# EAGLE board CT_schematic (EAGLE 7.6.0)

Size 100 x 80 mm. Coordinates in mm from the lower left corner, seen from the top.
Outline: 0,0 100,0 100,80 0,80 0,0
Copper layers (1*16): Top 0.035mm / dielectric 1.5mm / Bottom 0.035mm
Design rules "default": minimum track width 10mil, minimum drill 24mil, track to track 8mil, track to pad 8mil, pad to pad 8mil, via to via 8mil, smd to smd 8mil, copper to edge 40mil, drill to drill 8mil, minimum pad ring 10mil, minimum via ring 8mil, stop-mask expansion 4mil, vias tented up to drill 0mil, thermal gap 10mil

## Footprints (pad centres in the part's own frame; a part is rotated, then mirrored left to right if it is on the bottom)
C0603 = smd 0.8 x 0.8: 1 -0.762,0; 2 0.762,0
C0402 = smd 0.5 x 0.5: 1 -0.508,0; 2 0.508,0
C0805 = smd 1.2 x 1.3: 1 -1.016,0; 2 1.016,0
C1210 = smd 1.2 x 2.5: 1 -1.524,0; 2 1.524,0
R0603 = smd 0.8 x 0.8: 1 -0.762,0; 2 0.762,0
EXV-9H = smd 3.505 x 1.676: 1 -2.857,0; 2 2.857,0
L0603 = smd 0.8 x 0.8: 1 -0.762,0; 2 0.762,0
L1210 = smd 1.2 x 2.5: 1 -1.524,0; 2 1.524,0
PJ-037B_PACKAGE = drill 3.7 square: 1 12,0 | drill 3.2 square: 2 6,0
UFBGA64 = smd 0.2 x 0.2: A1 -1.75,1.75; A2 -1.25,1.75; A3 -0.75,1.75; A4 -0.25,1.75; A5 0.25,1.75; A6 0.75,1.75; A7 1.25,1.75; A8 1.75,1.75; B1 -1.75,1.25; B2 -1.25,1.25; B3 -0.75,1.25; B4 -0.25,1.25; B5 0.25,1.25; B6 0.75,1.25; B7 1.25,1.25; B8 1.75,1.25; C1 -1.75,0.75; C2 -1.25,0.75; C3 -0.75,0.75; C4 -0.25,0.75; C5 0.25,0.75; C6 0.75,0.75; C7 1.25,0.75; C8 1.75,0.75; D1 -1.75,0.25; D2 -1.25,0.25; D3 -0.75,0.25; D4 -0.25,0.25; D5 0.25,0.25; D6 0.75,0.25; D7 1.25,0.25; D8 1.75,0.25; E1 -1.75,-0.25; E2 -1.25,-0.25; E3 -0.75,-0.25; E4 -0.25,-0.25; E5 0.25,-0.25; E6 0.75,-0.25; E7 1.25,-0.25; E8 1.75,-0.25; F1 -1.75,-0.75; F2 -1.25,-0.75; F3 -0.75,-0.75; F4 -0.25,-0.75; F5 0.25,-0.75; F6 0.75,-0.75; F7 1.25,-0.75; F8 1.75,-0.75; G1 -1.75,-1.25; G2 -1.25,-1.25; G3 -0.75,-1.25; G4 -0.25,-1.25; G5 0.25,-1.25; G6 0.75,-1.25; G7 1.25,-1.25; G8 1.75,-1.25; H1 -1.75,-1.75; H2 -1.25,-1.75; H3 -0.75,-1.75; H4 -0.25,-1.75; H5 0.25,-1.75; H6 0.75,-1.75; H7 1.25,-1.75; H8 1.75,-1.75
SSOP-20 = smd 1.651 x 0.432: 1 -3.48,2.925; 2 -3.48,2.275; 3 -3.48,1.625; 4 -3.48,0.975; 5 -3.48,0.325; 6 -3.48,-0.325; 7 -3.48,-0.975; 8 -3.48,-1.625; 9 -3.48,-2.275; 10 -3.48,-2.925; 11 3.48,-2.925; 12 3.48,-2.275; 13 3.48,-1.625; 14 3.48,-0.975; 15 3.48,-0.325; 16 3.48,0.325; 17 3.48,0.975; 18 3.48,1.625; 19 3.48,2.275; 20 3.48,2.925
HTSS-105-01-G-D = drill 1 pad 1.8 square: 1 0,0 | drill 1 pad 1.8: 2 0,2.54; 3 2.54,0; 4 2.54,2.54; 5 5.08,0; 6 5.08,2.54; 7 7.62,0; 8 7.62,2.54; 9 10.16,0; 10 10.16,2.54
SI7034-A10-IM = smd 0.75 x 0.4: 1 -1,0.5; 2 -1,-0.5; 4 1,-0.5; 5 1,0.5 | smd 0.8 x 1.7: 3 0,0
QFN-28 = smd 0.813 x 0.305: 1 -2.451,1.5; 2 -2.451,1; 3 -2.451,0.5; 4 -2.451,0; 5 -2.451,-0.5; 6 -2.451,-1; 7 -2.451,-1.5; 15 2.451,-1.5; 16 2.451,-1; 17 2.451,-0.5; 18 2.451,0; 19 2.451,0.5; 20 2.451,1; 21 2.451,1.5 | smd 0.305 x 0.813: 8 -1.5,-2.451; 9 -1,-2.451; 10 -0.5,-2.451; 11 0,-2.451; 12 0.5,-2.451; 13 1,-2.451; 14 1.5,-2.451; 22 1.5,2.451; 23 1,2.451; 24 0.5,2.451; 25 0,2.451; 26 -0.5,2.451; 27 -1,2.451; 28 -1.5,2.451 | smd 3.607 x 3.607: 29 0,0
SJ-43515TS-SMT-TR = smd 2.2 x 3: 1 0.6,-7.4; 4 3.4,-7.4 | smd 3 x 3: 2 12.8,-7.4; 5 17,-3 | smd 2 x 3: 3 5.3,0; 6 2.5,0 | drill 1.8: P$7 4.5,-3.69; P$8 11.54,-3.69
ABS07-32.768KHZ-7-T = smd 1.1 x 2.4: 1 -2.5,0; 2 0,0
ASFL1 = smd 1.7 x 1.5: 1 -1.27,-1.1; 2 1.27,-1.1; 3 1.27,1.1; 4 -1.27,1.1
WSON-8 = smd 0.3 x 0.6: 1 -0.75,0; 2 0.05,0; 3 0.85,0; 4 1.65,0; 5 1.65,3.8; 6 0.85,3.8; 7 0.05,3.8; 8 -0.75,3.8 | smd 3 x 2.6: PAD 0.45,1.9
SON-6 = smd 0.55 x 0.3: 1 -0.355,0.5 | smd 0.52 x 0.3: 2 -0.37,0; 3 -0.37,-0.5; 4 0.37,-0.5; 5 0.37,0; 6 0.37,0.5
DCU0008A_N = smd 0.5 x 0.3: 1 -1.6,0.75; 2 -1.6,0.25; 3 -1.6,-0.25; 4 -1.6,-0.75; 5 1.6,-0.75; 6 1.6,-0.25; 7 1.6,0.25; 8 1.6,0.75
SW_4-1437565-2 = smd 1.4 x 2.1: 1 -2.23,4.55; 2 -2.23,-4.55; 3 2.23,4.55; 4 2.23,-4.55
LGM67K-G1J2-24-Z = smd 0.8 x 1.4: A -2,0; C 0,0
NC7SZ125M5X = smd 1.3 x 0.7: 1 -1.3,0.95; 2 -1.3,0; 3 -1.3,-0.95; 4 1.3,-0.95; 5 1.3,0.95

## Placement (x,y rotation side)
C1  1e-06  [C0603]  -19.05,69.85 0 top  (outside the outline)
C2  1e-07  [C0603]  -22.86,69.85 0 top  (outside the outline)
C3  1e-07  [C0603]  -26.67,69.85 0 top  (outside the outline)
C4  1e-07  [C0603]  -30.48,69.85 0 top  (outside the outline)
C5  4.7e-06  [C0603]  -15.24,69.85 0 top  (outside the outline)
C6  1e-07  [C0603]  -34.29,69.85 0 top  (outside the outline)
C7  1e-07  [C0603]  -38.1,69.85 0 top  (outside the outline)
C8  1e-08  [C0603]  -41.91,69.85 0 top  (outside the outline)
C9  1e-06  [C0603]  -45.72,69.85 0 top  (outside the outline)
C10  1e-11  [C0402]  -26.67,74.93 0 top  (outside the outline)
C11  1e-11  [C0402]  -30.48,74.93 0 top  (outside the outline)
C12  1e-06  [C0603]  -49.53,69.85 0 top  (outside the outline)
C13  1e-06  [C0603]  -53.34,69.85 0 top  (outside the outline)
C14  1e-06  [C0603]  -57.15,69.85 0 top  (outside the outline)
C15  4.7e-06  [C0805]  -27.94,58.42 0 top  (outside the outline)
C16  1e-07  [C0402]  -34.29,74.93 0 top  (outside the outline)
C17  2.2e-05  [C1210]  -57.15,50.8 0 top  (outside the outline)
C18  2.2e-05  [C1210]  -63.5,50.8 0 top  (outside the outline)
C19  1e-09  [C0402]  -38.1,74.93 0 top  (outside the outline)
C20  1e-09  [C0402]  -41.91,74.93 0 top  (outside the outline)
C21  1e-07  [C0402]  -45.72,74.93 0 top  (outside the outline)
C22  1e-07  [C0402]  -49.53,74.93 0 top  (outside the outline)
C23  1e-07  [C0402]  -53.34,74.93 0 top  (outside the outline)
C24  1e-07  [C0402]  -57.15,74.93 0 top  (outside the outline)
C25  1e-07  [C0402]  -60.96,74.93 0 top  (outside the outline)
C26  1e-05  [C0805]  -33.02,58.42 0 top  (outside the outline)
C27  1e-05  [C0805]  -38.1,58.42 0 top  (outside the outline)
C28  1e-05  [C0805]  -43.18,58.42 0 top  (outside the outline)
C29  1e-05  [C0805]  -48.26,58.42 0 top  (outside the outline)
C30  1e-05  [C0805]  -53.34,58.42 0 top  (outside the outline)
C31  1e-08  [C0402]  -64.77,74.93 0 top  (outside the outline)
C32  1e-08  [C0402]  -68.58,74.93 0 top  (outside the outline)
C33  8e-07  [R0603]  -60.96,69.85 0 top  (outside the outline)
C34  1e-05  [C0805]  -58.42,58.42 0 top  (outside the outline)
C35  1e-08  [C0402]  -72.39,74.93 0 top  (outside the outline)
C36  1e-05  [C1210]  -69.85,50.8 0 top  (outside the outline)
C37  1e-05  [C1210]  -76.2,50.8 0 top  (outside the outline)
C38  1e-07  [C0402]  -76.2,74.93 0 top  (outside the outline)
C39  0.0001  [EXV-9H]  -55.88,41.91 0 top  (outside the outline)
C40  0.0001  [EXV-9H]  -67.31,41.91 0 top  (outside the outline)
C41  1e-08  [C0402]  -15.24,80.01 0 top  (outside the outline)
C42  1e-07  [C0402]  -19.05,80.01 0 top  (outside the outline)
C43  1e-08  [C0402]  -22.86,80.01 0 top  (outside the outline)
C44  1e-07  [C0402]  -26.67,80.01 0 top  (outside the outline)
C45  1e-08  [C0402]  -30.48,80.01 0 top  (outside the outline)
F1  240.0  [L0603]  -64.77,69.85 0 top  (outside the outline)
I1  1.5e-05  [L1210]  -16.51,58.42 0 top  (outside the outline)
J1  PJ-037B  [PJ-037B_PACKAGE]  -27.94,21.59 0 top  (outside the outline)
R2  1000.0  [R0603]  -68.58,69.85 0 top  (outside the outline)
R4  4700.0  [R0603]  -72.39,69.85 0 top  (outside the outline)
R7  10000.0  [R0603]  -45.72,64.77 0 top  (outside the outline)
R8  100000.0  [R0603]  -63.5,58.42 0 top  (outside the outline)
R9  100000.0  [R0603]  -68.58,58.42 0 top  (outside the outline)
R10  100000.0  [R0603]  -73.66,58.42 0 top  (outside the outline)
R11  47000.0  [R0603]  -50.8,64.77 0 top  (outside the outline)
R12  47000.0  [R0603]  -55.88,64.77 0 top  (outside the outline)
R13  47000.0  [R0603]  -60.96,64.77 0 top  (outside the outline)
R14  680.0  [R0603]  -76.2,69.85 0 top  (outside the outline)
R15  100000.0  [R0603]  -15.24,64.77 0 top  (outside the outline)
R16  36000.0  [R0603]  -66.04,64.77 0 top  (outside the outline)
R17  100000.0  [R0603]  -20.32,64.77 0 top  (outside the outline)
R18  100000.0  [R0603]  -25.4,64.77 0 top  (outside the outline)
R19  2231.0  [R0603]  -15.24,74.93 0 top  (outside the outline)
R20  1000.0  [R0603]  -19.05,74.93 0 top  (outside the outline)
R21  10000.0  [R0603]  -71.12,64.77 0 top  (outside the outline)
R22  10000.0  [R0603]  -76.2,64.77 0 top  (outside the outline)
R23  9100.0  [R0603]  -22.86,74.93 0 top  (outside the outline)
R24  680000.0  [R0603]  -30.48,64.77 0 top  (outside the outline)
R25  120000.0  [R0603]  -35.56,64.77 0 top  (outside the outline)
R26  200000.0  [R0603]  -40.64,64.77 0 top  (outside the outline)
U1  stm32f051r8h7  [UFBGA64]  -22.86,33.02 0 top  (outside the outline)
U2  MAX3218EAP+T  [SSOP-20]  -31.75,33.02 0 top  (outside the outline)
U3  HTSS-105-01-G-D  [HTSS-105-01-G-D]  -63.5,19.05 0 top  (outside the outline)
U4  Si7034-A10-IM  [SI7034-A10-IM]  -49.53,78.74 0 top  (outside the outline)
U5  WM8731CLSEFL  [QFN-28]  -49.53,50.8 0 top  (outside the outline)
U6  SJ-43515TS-SMT-TR  [SJ-43515TS-SMT-TR]  -39.37,10.16 0 top  (outside the outline)
U7  SJ-43515TS-SMT-TR  [SJ-43515TS-SMT-TR]  -67.31,10.16 0 top  (outside the outline)
U8  ABS07-32.768KHZ-7-T  [ABS07-32.768KHZ-7-T]  -27.94,52.07 0 top  (outside the outline)
U9  ASFL1-12.288MHZ-EC-T  [ASFL1]  -30.48,43.18 0 top  (outside the outline)
U10  ASFL1-25MHZ-NCS  [ASFL1]  -46.99,43.18 0 top  (outside the outline)
U11  LP2951ACSDX/NOPB  [WSON-8]  -72.39,31.75 0 top  (outside the outline)
U12  LP3878SDX-ADJ/NOPB  [WSON-8]  -54.61,31.75 0 top  (outside the outline)
U13  TPS3895ADRYR  [SON-6]  -53.34,78.74 0 top  (outside the outline)
U14  LSF0102DCTR  [DCU0008A_N]  -43.18,78.74 0 top  (outside the outline)
U15  4-1437565-2  [SW_4-1437565-2]  -44.45,21.59 0 top  (outside the outline)
U16  Q65110A2395  [LGM67K-G1J2-24-Z]  -36.83,50.8 0 top  (outside the outline)
U17  nc7sz125m5x  [NC7SZ125M5X]  -21.59,58.42 0 top  (outside the outline)

## Library data of the parts
C1-C45 F1 I1 J1 R2 R4 R7-R26 U1-U17 = circuit_tree

## Nets
CLK_CRYSTAL_U1_A1: C10.1 U1.A1 U8.1
CLK_CRYSTAL_U1_B1: C11.1 U1.B1 U8.2
CLK_U1_C1: U1.C1 U10.3
CLK_U5_1: U5.1 U9.3
GND: C1.2 C2.2 C3.2 C4.2 C5.2 C6.2 C7.2 C8.2 C9.2 C10.2 C11.2 C12.2 C13.2 C14.2 C16.2 C20.2 C21.2 C22.2 C23.2 C24.2 C25.2 C26.2 C27.2 C28.2 C29.2 C30.2 C31.2 C32.2 C33.2 C34.2 C35.2 C36.2 C37.2 C38.2 C39.2 C40.2 C41.2 C42.2 C43.2 C44.2 C45.2 J1.2 R2.2 R7.2 R11.2 R12.2 R13.2 R17.2 R20.2 R23.2 R25.2 U1.D4 U1.D5 U1.F1 U2.5 U2.17 U2.20 U3.9 U4.5 U5.4 U5.15 U5.19 U5.25 U5.26 U5.29 U6.1 U7.1 U9.2 U10.2 U11.3 U11.4 U11.PAD U12.3 U12.PAD U13.2 U14.1 U16.C U17.1 U17.3
NET_U1_A3: U14.3
NET_U1_B3: U14.4
NET_U1_B4: R7.1 U1.B4
NET_U1_E1: R4.1 U1.E1 U17.4
NET_U1_H1: C8.1 C9.1 F1.1 U1.H1
NET_U1_H7: U16.A
NET_U1_H8: U15.3 U15.4
NET_U2_1: I1.1 U2.1
NET_U2_2: R8.1 U2.2
NET_U2_3: R9.1 U2.3
NET_U2_4: R10.1 U2.4
NET_U2_15: C14.1 U2.15
NET_U2_16: C15.2 U2.16
NET_U2_18: C15.1 U2.18
NET_U2_19: C13.1 U2.19
NET_U3_3: U2.12 U3.3
NET_U3_4: U2.11 U3.4
NET_U3_5: U2.14 U3.5
NET_U3_6: U2.13 U3.6
NET_U5_9: U5.9
NET_U5_20: C25.1 C30.1 U5.20
NET_U6_2: C18.1 R12.1 U6.2
NET_U6_5: C17.1 R11.1 U6.5
NET_U6_13: C17.2
NET_U6_14: C18.2
NET_U7_5: C19.1 C20.1 R13.1 R14.1 U7.5
NET_U7_21: R14.2
NET_U7_22: C19.2
NET_U11_5: R15.1 U11.5
NET_U11_7: R16.2 R17.1 U11.7
NET_U12_1: C35.1 U12.1
NET_U12_6: R19.2 R20.1 U12.6
NET_U12_8: R18.1 U12.8
NET_U13_1: R22.1 R23.1 U13.1
NET_U13_3: R24.2 R25.1 U13.3
NET_U13_4: R21.1 U13.4 U17.2
NET_U14_8: R26.1 U14.8
NET_U15_1: R2.1 U15.1 U15.2
PROC_I2C1_SCL_TOXCVR: U4.2 U14.5
PROC_I2C1_SDA_TOXCVR: U4.4 U14.6
PROC_I2S1_CK: U1.A5 U5.7
PROC_I2S1_SD: U1.C4 U5.8
PROC_I2S1_WS: U1.A6 U5.9 U5.11
PROC_USART1_CTS: U1.C8 U2.8
PROC_USART1_RTS: U1.B8 U2.10
PROC_USART1_RX: U1.C3 U2.9
PROC_USART1_TX: U1.C7 U2.7
VCC_S1_11V7: C33.1 C36.1 C39.1 C40.1 J1.1 R18.2 U11.8 U12.4
VCC_TIER1_1V8: C16.1 C21.1 C23.1 C24.1 C26.1 C28.1 C29.1 C34.1 C41.1 C42.1 C45.1 R15.2 R16.1 R26.2 U4.1 U5.5 U5.12 U5.18 U11.1 U14.7 U17.5
VCC_TIER1_3V3: C1.1 C2.1 C3.1 C4.1 C5.1 C6.1 C7.1 C12.1 C22.1 C27.1 C31.1 C32.1 C37.1 C38.1 C43.1 C44.1 F1.2 I1.2 R4.2 R8.2 R9.2 R10.2 R19.1 R21.2 R22.2 R24.1 U1.B2 U1.E4 U1.E5 U2.6 U5.3 U9.4 U10.4 U12.5 U13.6 U14.2

## Tracks (layer width: path | path; a pad name or v marks a point on that pad's centre or on a via)
CLK_CRYSTAL_U1_A1  (2 unrouted)
CLK_CRYSTAL_U1_B1  (2 unrouted)
CLK_U1_C1  (1 unrouted)
CLK_U5_1  (1 unrouted)
GND  (78 unrouted)
NET_U1_B4  (1 unrouted)
NET_U1_E1  (2 unrouted)
NET_U1_H1  (3 unrouted)
NET_U1_H8  (1 unrouted)
NET_U2_1  (1 unrouted)
NET_U2_2  (1 unrouted)
NET_U2_3  (1 unrouted)
NET_U2_4  (1 unrouted)
NET_U2_15  (1 unrouted)
NET_U2_16  (1 unrouted)
NET_U2_18  (1 unrouted)
NET_U2_19  (1 unrouted)
NET_U3_3  (1 unrouted)
NET_U3_4  (1 unrouted)
NET_U3_5  (1 unrouted)
NET_U3_6  (1 unrouted)
NET_U5_20  (2 unrouted)
NET_U6_2  (2 unrouted)
NET_U6_5  (2 unrouted)
NET_U7_5  (4 unrouted)
NET_U11_5  (1 unrouted)
NET_U11_7  (2 unrouted)
NET_U12_1  (1 unrouted)
NET_U12_6  (2 unrouted)
NET_U12_8  (1 unrouted)
NET_U13_1  (2 unrouted)
NET_U13_3  (2 unrouted)
NET_U13_4  (2 unrouted)
NET_U14_8  (1 unrouted)
NET_U15_1  (2 unrouted)
PROC_I2C1_SCL_TOXCVR  (1 unrouted)
PROC_I2C1_SDA_TOXCVR  (1 unrouted)
PROC_I2S1_CK  (1 unrouted)
PROC_I2S1_SD  (1 unrouted)
PROC_I2S1_WS  (2 unrouted)
PROC_USART1_CTS  (1 unrouted)
PROC_USART1_RTS  (1 unrouted)
PROC_USART1_RX  (1 unrouted)
PROC_USART1_TX  (1 unrouted)
VCC_S1_11V7  (7 unrouted)
VCC_TIER1_1V8  (20 unrouted)
VCC_TIER1_3V3  (35 unrouted)